# Altium PCB BoatSensor.PcbDoc
Units mil, origin at the board's own origin, x right, y up, seen from the top; angles counter-clockwise.
Board outline 2978.94 x 2978.94 mil, 2 copper layers (Top Layer, Bottom Layer); 66 components, 34 nets, 166 pads, 73 vias.
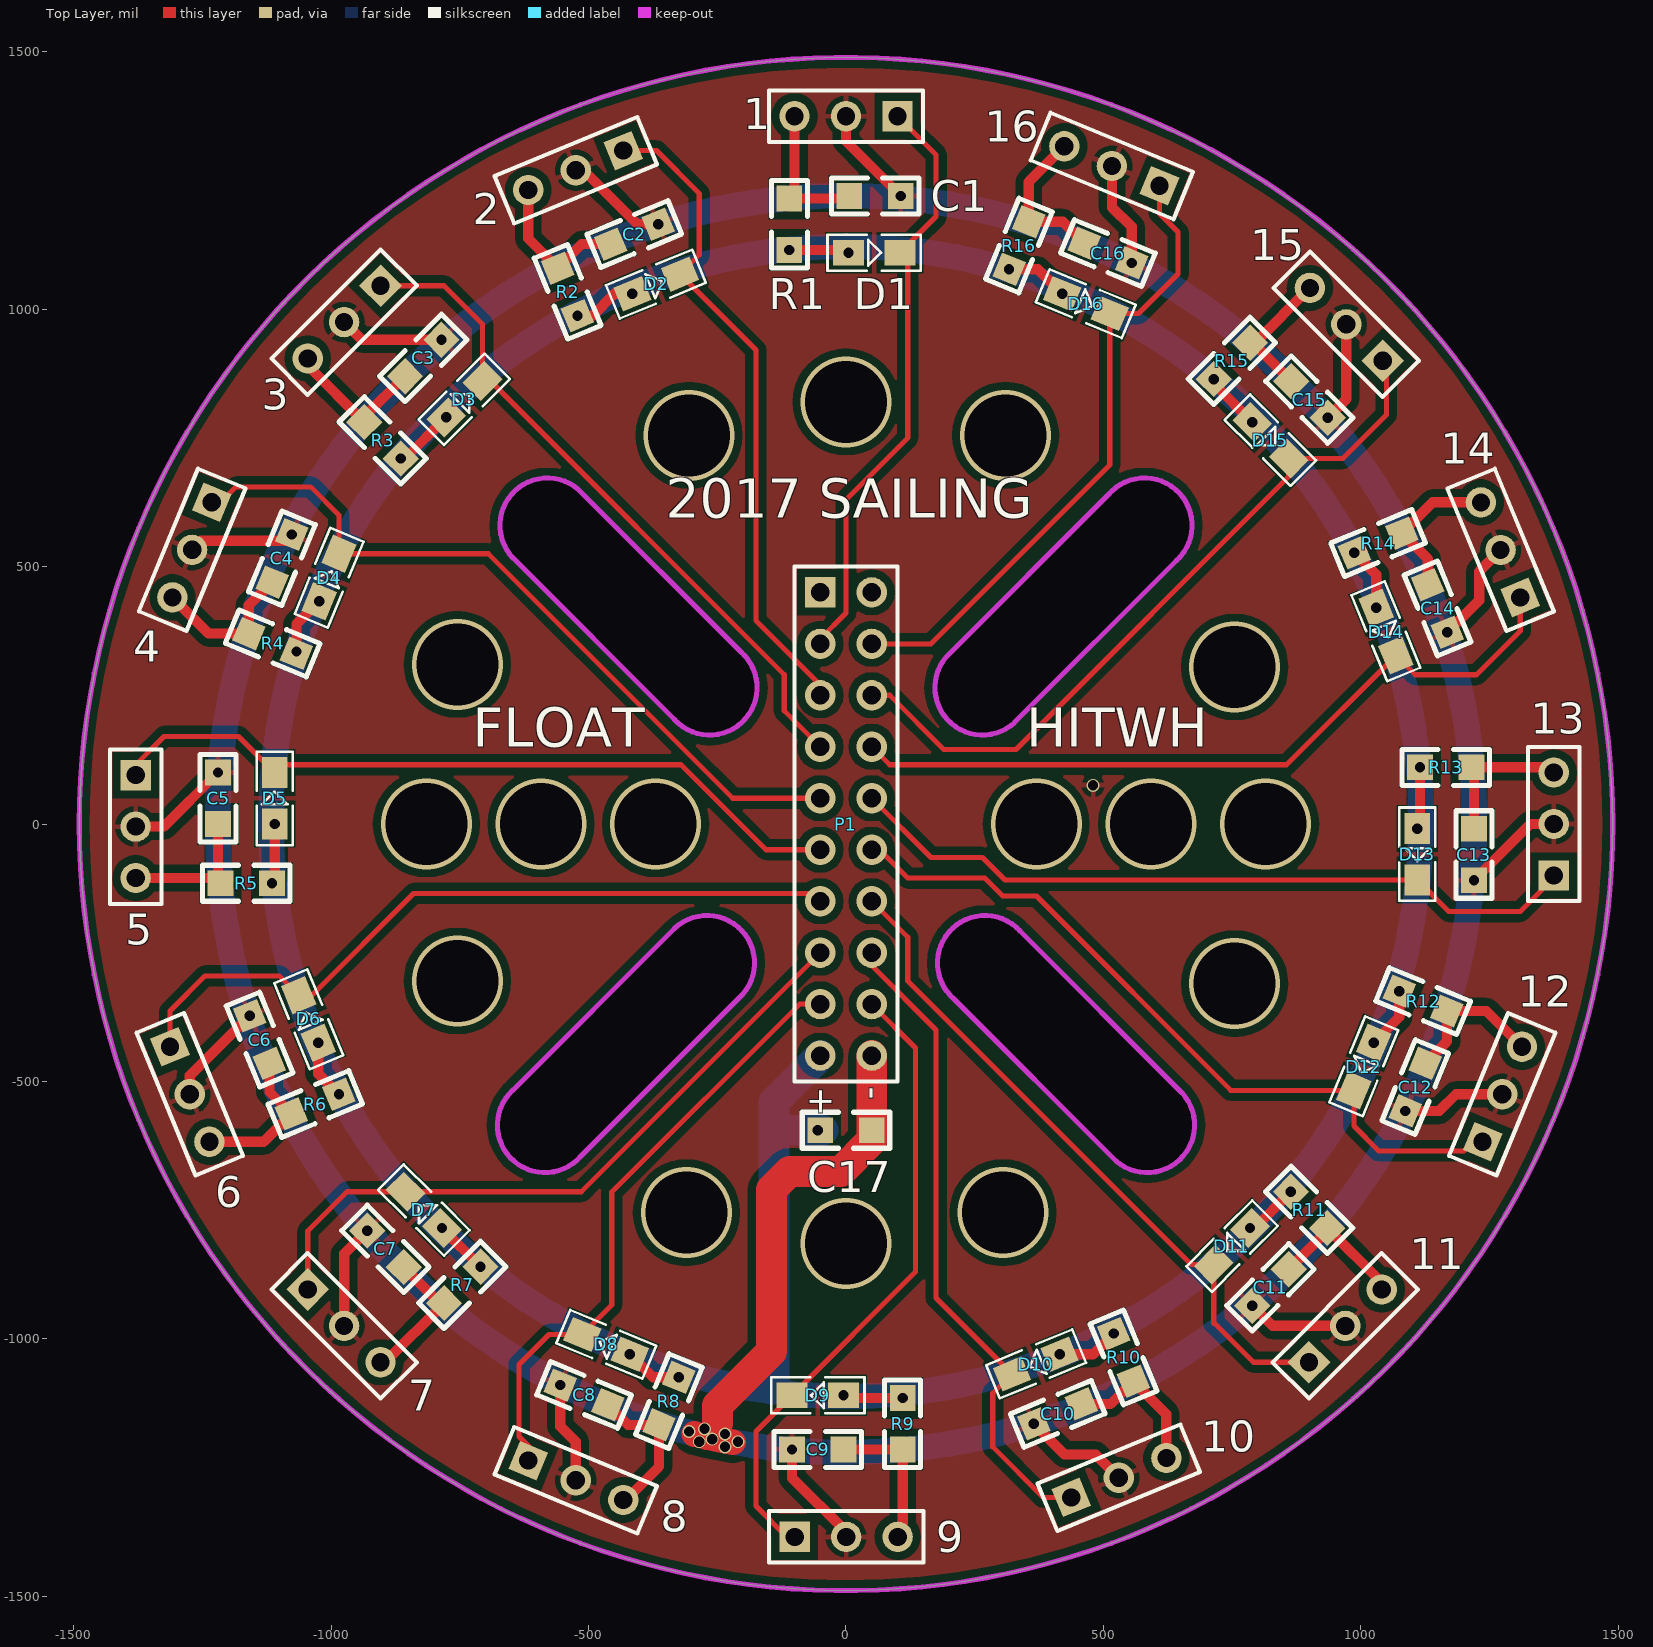
[diagram p0: Top Layer view]
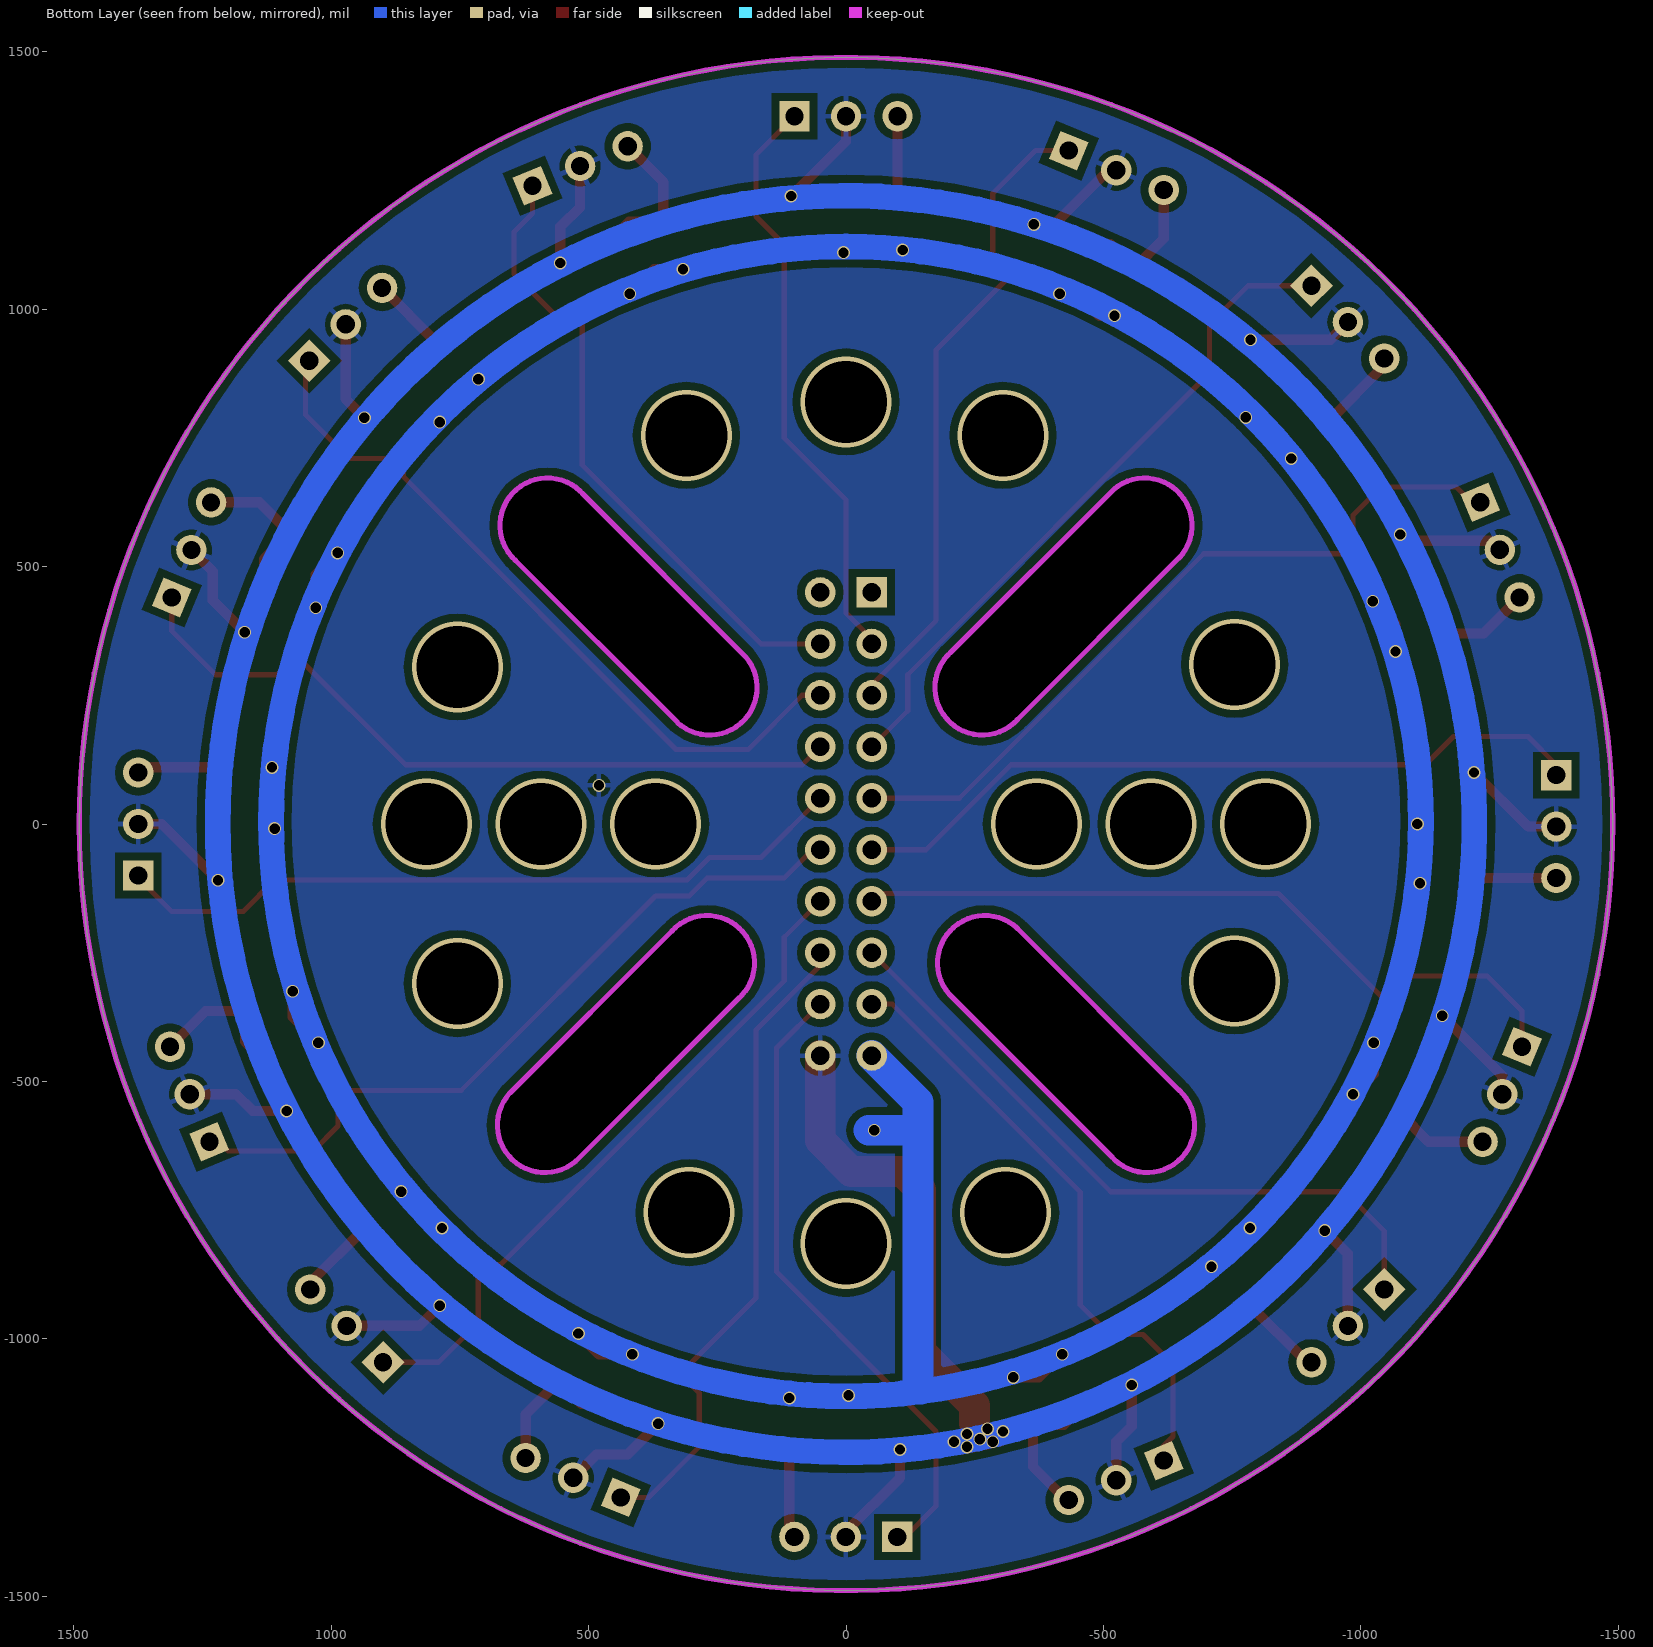
[diagram p1: Bottom Layer view, seen from below]

## Layer stack, top to bottom
Top Solder: solder mask 0.4, Solder Resist, Dk 3.5
Top Layer: signal copper 1.4
Dielectric 1: dielectric 12.6, FR-4, Dk 4.8
Bottom Layer: signal copper 1.4
Bottom Solder: solder mask 0.4, Solder Resist, Dk 3.5

## Board outline
-1489.47,0 ccw(c0,0) 0,-1489.47 ccw(c0,0) 1489.47,0 ccw(c0,0) 0,1489.47 ccw(c0,0)
cut-out: -647.5,517.5 -332.5,202.5 -332.65,202.36 ccw(c-265,265) -205,335 -520,650 ccw(c-580,580)
cut-out: 195,325 ccw(c265,265) 327.64,197.35 327.5,197.5 642.5,512.5 642.64,512.35 ccw(c580,580) 510,640
cut-out: 210,-340 525,-655 ccw(c585,-585) 652.65,-522.36 652.5,-522.5 337.5,-207.5 337.65,-207.36 ccw(c270,-270)
cut-out: -647.64,-517.35 ccw(c-585,-585) -515,-645 -200,-330 ccw(c-270,-270) -332.64,-202.35 -332.5,-202.5

## Design rules (kind name [scope] priority, off if disabled: settings)
Clearance [All] p1: gap=10
ComponentClearance [All] p1 off: gap=1 collisioncheckmode=3 verticalgap=1 showdistances=FALSE
PolygonConnect [All] p1: connectstyle=Relief reliefconductorwidth=10 reliefentries=4 polygonreliefangle="90 Angle" airgapwidth=10
RoutingVias [All] p1: holewidth=28 width=50 viastyle="Through Hole" minholewidth=1 minwidth=1 maxholewidth=500 maxwidth=500
SolderMaskExpansion [All] p1: expansion=4
Width [All] p1: maxlimit=80 minlimit=10 preferedwidth=10
29 further rules are at their usual default settings.

## Components (designator, comment, footprint, x,y, rotation, side; value= is the part's Value field where it differs from the comment)
1 "Header 3" HDR1X3 100,1375 r180 top (schematic designator P2)
2 "Header 3" HDR1X3 -432.61,1308.27 r202.5 top (schematic designator P3)
3 "Header 3" HDR1X3 -904.29,1045.71 r225 top (schematic designator P4)
4 "Header 3" HDR1X3 -1232,625 r247.5 top (schematic designator P5)
5 "Header 3" HDR1X3 -1380,95 r270 top (schematic designator P6)
6 "Header 3" HDR1X3 -1313.27,-432.61 r292.5 top (schematic designator P7)
7 "Header 3" HDR1X3 -1045.71,-904.29 r315 top (schematic designator P8)
8 "Header 3" HDR1X3 -617.39,-1236.73 r337.5 top (schematic designator P9)
9 "Header 3" HDR1X3 -99.67,-1385 r0 top (schematic designator P10)
10 "Header 3" HDR1X3 437.61,-1308.27 r22.5 top (schematic designator P11)
11 "Header 3" HDR1X3 899.29,-1045.71 r45 top (schematic designator P12)
12 "Header 3" HDR1X3 1236.73,-617.39 r67.5 top (schematic designator P13)
13 "Header 3" HDR1X3 1375,-100 r90 top (schematic designator P14)
14 "Header 3" HDR1X3 1310,440 r112.5 top (schematic designator P15)
15 "Header 3" HDR1X3 1042.67,900 r135 top (schematic designator P16)
16 "Header 3" HDR1X3 609,1240 r157.5 top (schematic designator P17)
C1 "Cap_2" 0805 6.5,1220 r0 top
C2 "Cap_2" 0805 -457.39,1126.73 r22.5 top
C3 "Cap_2" 0805 -856.67,870 r45 top
C4 "Cap_2" 0805 -1115,470 r67.5 top
C5 "Cap_2" 0805 -1220,0 r90 top
C6 "Cap_2" 0805 -1120,-465 r112.5 top
C7 "Cap_2" 0805 -859.29,-860.71 r135 top
C8 "Cap_2" 0805 -462.61,-1128.27 r157.5 top
C9 "Cap_2" 0805 -5,-1215 r180 top
C10 "Cap_2" 0805 457.39,-1126.73 r202.5 top
C11 "Cap_2" 0805 860,-865 r225 top
C12 "Cap_2" 0805 1125,-465 r247.5 top
C13 "Cap_2" 0805 1220,-9.3 r270 top
C14 "Cap_2" 0805 1130,465 r292.5 top
C15 "Cap_2" 0805 865,860 r315 top
C16 "Cap_2" 0805 462.61,1128.27 r337.5 top
C17 "Cap" 0805 -50,-595 r0 top
D1 "LED" LED_0805 5,1110 r0 top
D2 "LED" LED_0805 -415,1030 r22.5 top
D3 "LED" LED_0805 -776.67,790 r45 top
D4 "LED" LED_0805 -1023.27,432.61 r67.5 top
D5 "LED" LED_0805 -1110,0 r90 top
D6 "LED" LED_0805 -1025,-425 r112.5 top
D7 "LED" LED_0805 -785,-785 r135 top
D8 "LED" LED_0805 -420,-1030 r157.5 top
D9 "LED" LED_0805 -5,-1110 r180 top
D10 "LED" LED_0805 415,-1030 r202.5 top
D11 "LED" LED_0805 785,-785 r225 top
D12 "LED" LED_0805 1025,-425 r247.5 top
D13 "LED" LED_0805 1110,-9 r270 top
D14 "LED" LED_0805 1030,420 r292.5 top
D15 "LED" LED_0805 789.29,780.71 r315 top
D16 "LED" LED_0805 420,1030 r337.5 top
P1 "Header 10X2" HDR2X10 -50,450 r270 top
R1 "Res_" 0805 -110,1215 r270 top
R2 "Res_" 0805 -560,1080 r292.5 top
R3 "Res_" 0805 -935.71,780.71 r315 top
R4 "Res_" 0805 -1160,370 r337.5 top
R5 "Res_" 0805 -1215,-115 r0 top
R6 "Res_" 0805 -1077.39,-563.27 r22.5 top
R7 "Res_" 0805 -780.71,-930.71 r45 top
R8 "Res_" 0805 -363.27,-1167.39 r67.5 top
R9 "Res_" 0805 110,-1215 r90 top
R10 "Res_" 0805 558.27,-1082.39 r112.5 top
R11 "Res_" 0805 935,-785 r135 top
R12 "Res_" 0805 1167.39,-363.27 r157.5 top
R13 "Res_" 0805 1215,110 r180 top
R14 "Res_" 0805 1080,565 r202.5 top
R15 "Res_" 0805 785,935 r225 top
R16 "Res_" 0805 355,1170 r247.5 top

## Footprints (in the part's own frame and the unit in brackets; to place one, negate y for a bottom-side part, rotate by r counter-clockwise, add the part's x,y. Pads: shape width x height; smd on the part's side, far side on the other; paste and mask are expansions set on the pad)
0805 [mil] "Chip Capacitor, 2-Leads, Body 2.0x1.3mm, IPC Medium Density"
  rect 50x50 smd: 1(0,0) 2(100,0)
  silkscreen extent -35,-35 135,35
HDR1X3 [mm] "Connector; Header; 3 Position"
  rect 1.5x1.5 hole 0.9: 1(0,0)
  round 1.5 hole 0.9: 2(2.54,0) 3(5.08,0)
  silkscreen extent -1.27,-1.27 6.35,1.27
HDR2X10 [mm] "Connector; Header; 10x2 Position"
  rect 1.5x1.5 hole 0.9: 1(0,0)
  round 1.5 hole 0.9: 2(0,2.54) 3(2.54,0) 4(2.54,2.54) 5(5.08,0) 6(5.08,2.54) 7(7.62,0) 8(7.62,2.54) 9(10.16,0) 10(10.16,2.54) 11(12.7,0) 12(12.7,2.54) 13(15.24,0) 14(15.24,2.54) 15(17.78,0) 16(17.78,2.54) 17(20.32,0) 18(20.32,2.54) 19(22.86,0) 20(22.86,2.54)
  silkscreen extent -1.27,-1.27 24.13,3.81
LED_0805 [mil]
  rect 60x50 smd: 1(0,0) 2(100,0)
  silkscreen extent -41,-35 140,35

## Part data
1 2 3 4 5 6 7 8 9 10 11 12 13 14 15 16: "Header, 3-Pin"
P1: "Header, 10-Pin, Dual row"

## Via types
v1: diameter 25, hole 20, Top Layer to Bottom Layer, 57 vias
v2: diameter 177.17, hole 159.45, Top Layer to Bottom Layer, 16 vias

## Nets (pads, with @x,y where several pads share a name; then routed paths per layer and width w, separated by ;. In a path a pad name is that pad's centre, name@x,y a point inside that pad or via, vN(x,y) a via of type N, cw(c..) or ccw(c..) an arc to the next point about the centre after c; other vN are vias at no path point)
A1: 15.1 D15.2 P1.6 | length 1441.3
  Top Layer w10: P1.6 85,250 190,145 330,145 860,675 D15.2 965,710 1050,795 1050,892.67 15.1
A2: 16.1 D16.2 P1.4 | length 1251.6
  Top Layer w10: P1.4 165,350 512.39,697.39 D16.2 568.46,991.73 645,1068.27 645,1150 609,1186 16.1
B0: 1.1 D1.2 P1.3 | length 1161.7
  Top Layer w10: P1.3 -50,360 0,410 0,630 120,750 120,1095 D1.2 175,1180 175,1300 1.1
B3: 2.1 D2.2 P1.5 | length 1285.6
  Top Layer w10: 2.1 -368.27,1308.27 -285,1225 -285,1105.88 D2.2 -175,920.66 -175,395 -50,270 P1.5
B4: 3.1 D3.2 P1.7 | length 1330.9
  Top Layer w10: 3.1 -780.71,1045.71 -705.96,970.96 D3.2 -690.71,860.71 -120,290 -120,220 P1.7
B5: 4.1 D4.2 P1.9 | length 1489
  Top Layer w10: 4.1 -1215,625 -1185,655 -1040,655 -985,600 D4.2 -695,525 -220,50 P1.9
B6: 5.1 D5.2 P1.11 | length 1476.3
  Top Layer w10: 5.1 -1380,115 -1325,170 -1180,170 D5.2 -1095,115 -320.36,115 -155.36,-50 P1.11
B7: 6.1 D6.2 P1.13 | length 1464.5
  Top Layer w10: 6.1 -1313.27,-363.27 -1245,-295 -1100.88,-295 D6.2 -1037.61,-332.61 -840,-135 -65,-135 P1.13
B8: 7.1 D7.2 P1.15 | length 1333.3
  Top Layer w10: 7.1 -1045.71,-790.71 -969.29,-714.29 D7.2 -514.29,-714.29 P1.15
B9: 8.1 D8.2 P1.17 | length 1197.5
  Top Layer w10: 8.1 -617.39,-1207.61 -635,-1190 -635,-1050 -576.73,-991.73 D8.2 -455,-934.34 -455,-715 -90,-350 P1.17
B10: 9.1 D9.2 P1.18 | length 1238.8
  Top Layer w10: 9.1 -115,-1385 -175,-1325 -175,-1180 D9.2 135,-870 135,-435 P1.18
B11: 10.1 D10.2 P1.16 | length 1281.8
  Top Layer w10: P1.16 50,-275 175,-400 175,-920.66 D10.2 285,-1105.88 285,-1210 383.27,-1308.27 10.1
B12: 11.1 D11.2 P1.14 | length 1337
  Top Layer w10: P1.14 120,-220 120,-305 670.71,-855.71 D11.2 714.29,-970 715.71,-970 791.42,-1045.71 11.1
B13: 12.1 D12.2 P1.12 | length 1477
  Top Layer w10: P1.12 65,-50 120,-105 269.64,-105 304.64,-140 370,-140 747.39,-517.39 D12.2 986.73,-586.73 1035,-635 1200,-635 1217.61,-617.39 12.1
B14: 13.1 D13.2 P1.10 | length 1448.1
  Top Layer w10: P1.10 165,-65 265,-65 309,-109 D13.2 1171,-170 1310,-170 1375,-105 13.1
B15: 14.1 D14.2 P1.8 | length 1478.4
  Top Layer w10: P1.8 85,115 855.66,115 D14.2 1105.88,290 1225,290 1310,375 14.1
GND: 1.2 2.2 3.2 4.2 5.2 6.2 7.2 8.2 9.2 10.2 11.2 12.2 13.2 14.2 15.2 16.2 C1.2 C2.2 C3.2 C4.2 C5.2 C6.2 C7.2 C8.2 C9.2 C10.2 C11.2 C12.2 C13.2 C14.2 C15.2 C16.2 C17.2 P1.20 | length 11886.3
  Top Layer w20: 5.2 -1325,-5 v1(-1220,100) ; 6.2 -1275,-489.34 v1(-1158.27,-372.61) ; 4.2 -1252.88,550 -1089.12,550 v1(-1076.73,562.39) ; 7.2 -975,-835 v1(-930,-790) ; 3.2 -940.71,940.71 v1(-785.96,940.71) ; v1(-555,-1090) -555,-1170 -525,-1200 8.2 ; 2.2 -510,1270 -405,1165 v1(-365,1165) ; v1(-105,-1215) -105,-1270 0.33,-1375.33 9.2 ; 1.2 0,1326.5 v1(106.5,1220) ; v1(365,-1165) 425,-1225 485,-1225 10.2 ; 16.2 516.61,1198.39 555,1160 v1(555,1090) ; v1(789.29,-935.71) 828.58,-975 11.2 ; v1(935.71,789.29) 971.96,825.53 15.2 ; v1(1086.73,-557.39) 1152.61,-557.39 1185,-525 12.2 ; v1(1168.27,372.61) 1230,434.34 1230,490.66 14.2 ; v1(1220,-109.3) 1329.3,0 13.2
  Top Layer w50: v1@-294.99,-1185 ccw(c0,0) v1@-219.33,-1201.31
  Top Layer w60: -250,-1165 -250,-1130 -145,-1025 -145,-710 -110,-675 -10,-675 50,-615 C17.2 P1.20
  Bottom Layer w50: 1220.68,0 ccw(c0,0) 1220.68,0
  other v1: -235,-1210 -285,-1200 -210,-1200 -260,-1195 -235,-1185 -305,-1180 -275,-1175 480,75
NetC1_1: 1.3 C1.1 R1.1 | length 282.7
  Top Layer w20: 1.3 -100,1225 R1.1 1.5,1215 C1.1
NetC2_1: 2.3 C2.1 R2.1 | length 297.5
  Top Layer w20: 2.3 -617.39,1137.39 R2.1 -513.27,1126.73 C2.1
NetC3_1: 3.3 C3.1 R3.1 | length 291.2
  Top Layer w20: 3.3 -1045.71,890.71 R3.1 -935.71,790.96 C3.1
NetC4_1: 4.3 C4.1 R4.1 | length 296.3
  Top Layer w20: 4.3 -1238.31,370 R4.1 -1160,425 C4.1
NetC5_1: 5.3 C5.1 R5.1 | length 279.1
  Top Layer w20: 5.3 -1225,-105 R5.1@-1220,-110 ; C5.1 R5.1@-1220,-110 ; R5.1 R5.1@-1220,-110
NetC6_1: 6.3 C6.1 R6.1 | length 297.7
  Top Layer w20: 6.3 -1131.51,-617.39 R6.1 -1120,-520.66 C6.1
NetC7_1: 7.3 C7.1 R7.1 | length 278.8
  Top Layer w20: 7.3 -895.71,-1045.71 R7.1 -789.29,-930.71 C7.1
NetC8_1: 8.3 C8.1 R8.1 | length 292.7
  Top Layer w20: C8.1 -423.49,-1167.39 R8.1 -363.27,-1248.27 -428.27,-1313.27 8.3
NetC9_1: 9.3 C9.1 R9.1 | length 289
  Top Layer w20: C9.1 R9.1 110,-1375.33 9.3
NetC10_1: 10.3 C10.1 R10.1 | length 295.2
  Top Layer w20: C10.1 513.92,-1126.73 R10.1 622.39,-1146.51 10.3
NetC11_1: 11.3 C11.1 R11.1 | length 274.1
  Top Layer w20: C11.1 935,-790 R11.1 1040.71,-890.71 11.3
NetC12_1: 12.3 C12.1 R12.1 | length 293.9
  Top Layer w20: C12.1 1167.39,-422.61 R12.1 1243.92,-363.27 12.3
NetC13_1: 13.3 C13.1 R13.1 | length 285.5
  Top Layer w20: C13.1 1220,105 R13.1 1365,110 13.3
NetC14_1: 14.3 C14.1 R14.1 | length 298.9
  Top Layer w20: C14.1 1130,515 R14.1 1139.78,624.78 14.3
NetC15_1: 15.3 C15.1 R15.1 | length 266.4
  Top Layer w20: R15.1 R15.1@790,935 ; C15.1 R15.1@790,935 ; 15.3 794.82,935 R15.1@790,935
NetC16_1: 16.3 C16.1 R16.1 | length 300.1
  Top Layer w20: 16.3 355,1247.31 R16.1 420.88,1170 C16.1
VCC3V3: C17.1 D1.1 D2.1 D3.1 D4.1 D5.1 D6.1 D7.1 D8.1 D9.1 D10.1 D11.1 D12.1 D13.1 D14.1 D15.1 D16.1 P1.19 R1.2 R2.2 R3.2 R4.2 R5.2 R6.2 R7.2 R8.2 R9.2 R10.2 R11.2 R12.2 R13.2 R14.2 R15.2 R16.2 | length 9676.3
  Top Layer w20: v1(-1115,-115) -1110,-110 v1(-1110,0) ; R4.2 v1(-1067.61,335) -1067.61,388.27 v1(-1023.27,432.61) ; v1(-1025,-425) -1025,-485 v1(-985,-525) ; v1(-865,710) -856.67,710 v1(-776.67,790) ; v1(-785,-785) v1(-710,-860) ; v1(-521.73,987.61) -492.39,987.61 -450,1030 v1(-415,1030) ; v1(-420,-1030) -375,-1075 v1(-325,-1075) ; v1(-110,1115) 0,1115 v1(5,1110) ; v1(-5,-1110) 0,-1115 v1(110,-1115) ; v1(316.73,1077.61) 372.39,1077.61 v1(420,1030) ; v1(415,-1030) 480,-1030 v1(520,-990) ; v1(714.29,864.29) 714.29,855.71 v1(789.29,780.71) ; v1(785,-785) 793.58,-785 v1(864.29,-714.29) ; v1(987.61,526.73) 1030,484.34 v1(1030,420) ; v1(1025,-425) 1075,-375 v1(1075,-325) ; v1(1110,-9) 1115,-4 v1(1115,110)
  Bottom Layer w50: 1116.89,5 ccw(c0,5) 1116.89,5
  Bottom Layer w60: -140,-1090 -140,-595 ; P1.19 -140,-540 -140,-595 ; v1@-45,-595 v1(-55,-595) -140,-595
pads on no net: P1.1 P1.2
copper on no net:
  other v2: 0,-815 -310,-755 305,-755 755,-310 -755,-305 -815,0 -592.5,0 -370,0 370,0 592.5,0 815,0 755,305 -755,310 -305,755 310,755 0,820

## Polygon pours and split planes (outlines as drawn)
GND on Top Layer "Top Layer-No Net" (solid, remove dead copper, pour order 14): -1500,1500 1505,1500 1505,-1495 1500,-1500 -1505,-1500
GND on Bottom Layer "Top Layer-No Net" (solid, remove dead copper, pour order 16): -1500,1500 1495,1500 1500,1495 1500,-1500 -1500,-1500

## Keep-outs
Keep-Out Layer:
  circle w10: c0,0 r1489.47
  lines w10: -647.64,-517.35 ccw(c-585,-585) -515,-645 -200,-330 ccw(c-270,-270) -332.64,-202.35 ; -647.65,517.36 cw(c-580,580) -520,650 -205,335 cw(c-265,265) -332.65,202.36 ; -647.5,-517.5 -332.5,-202.5 ; -647.5,517.5 -332.5,202.5 ; 327.5,197.5 642.5,512.5 ; 327.64,197.35 cw(c265,265) 195,325 510,640 cw(c580,580) 642.64,512.35 ; 337.5,-207.5 652.5,-522.5 ; 337.65,-207.36 ccw(c270,-270) 210,-340 525,-655 ccw(c585,-585) 652.65,-522.36

## Other copper
Top Layer:
  pour cut-out: -652.5,522.5 -337.5,207.5 -337.65,207.36 ccw(c-270,270) -210,340 -525,655 ccw(c-585,585)

## Silkscreen, mask and mechanical layers (free items; w line width, h text height)
Top Overlay:
  text "2017 SAILING" at -350,570 h130
  text "FLOAT" at -725,125 h130
  text "HITWH" at 350,125 h130

## Text inside footprints (layer, text, board x,y; h text height)
P1: Top Overlay "-" at 30,-510 h50 r270; Top Overlay "+" at -70,-510 h50 r270